# Altium PCB Green.PcbDoc (part 1 of 2)
Units mil, origin at the board's own origin, x right, y up, seen from the top; angles counter-clockwise.
Board outline 6000 x 4000 mil, 4 copper layers (Top Layer, VCC, GND, Bottom Layer); 96 components, 58 nets, 276 pads, 296 vias.
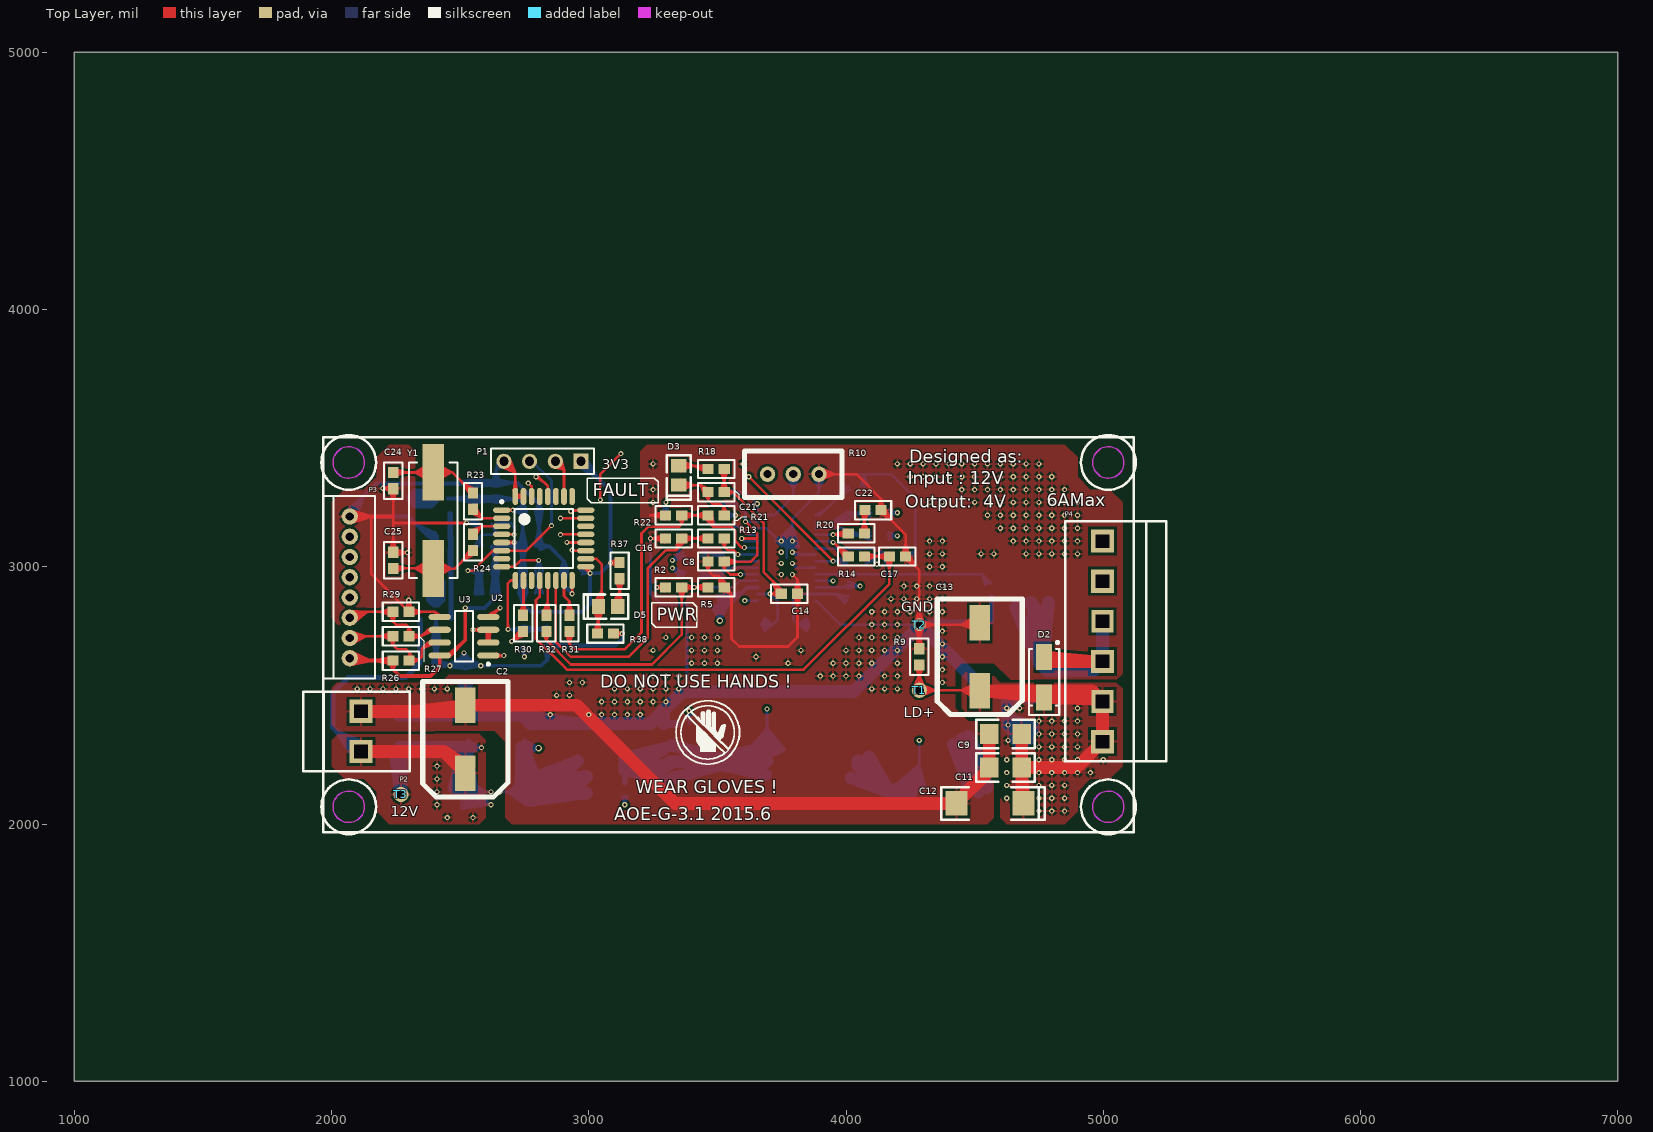
[diagram p0: Top Layer view]
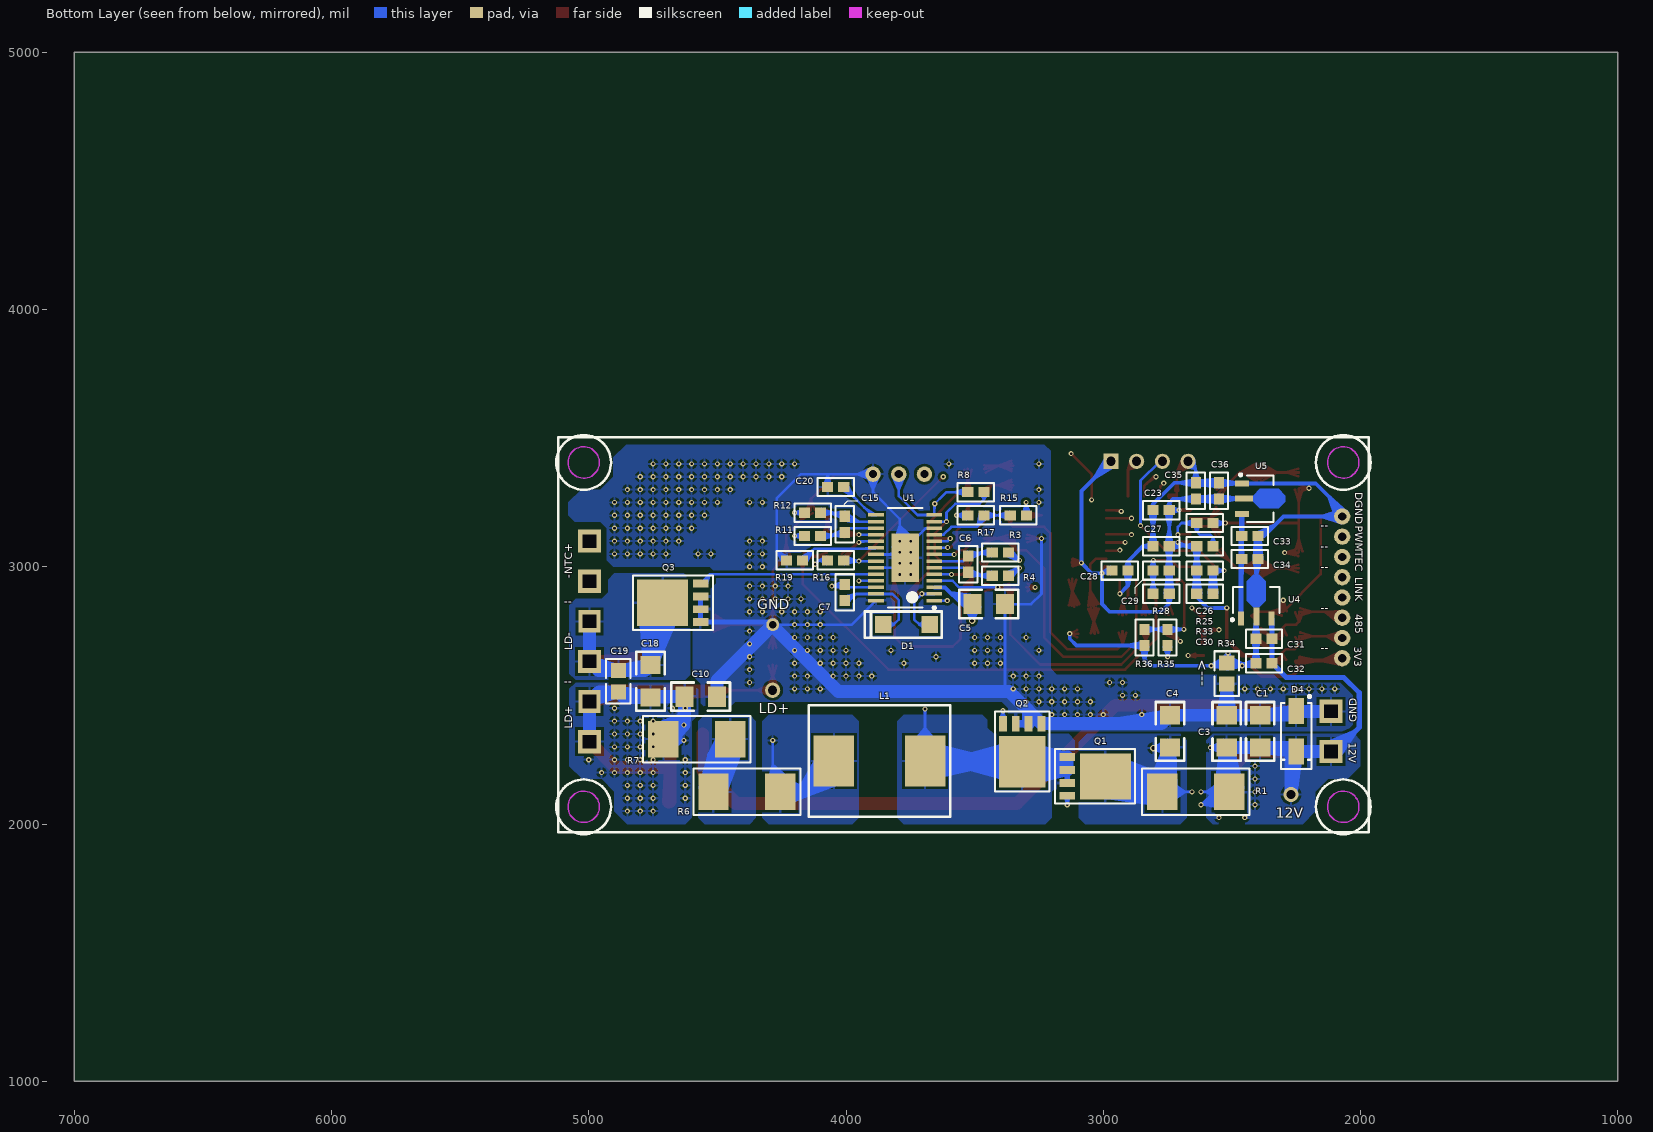
[diagram p1: Bottom Layer view, seen from below]
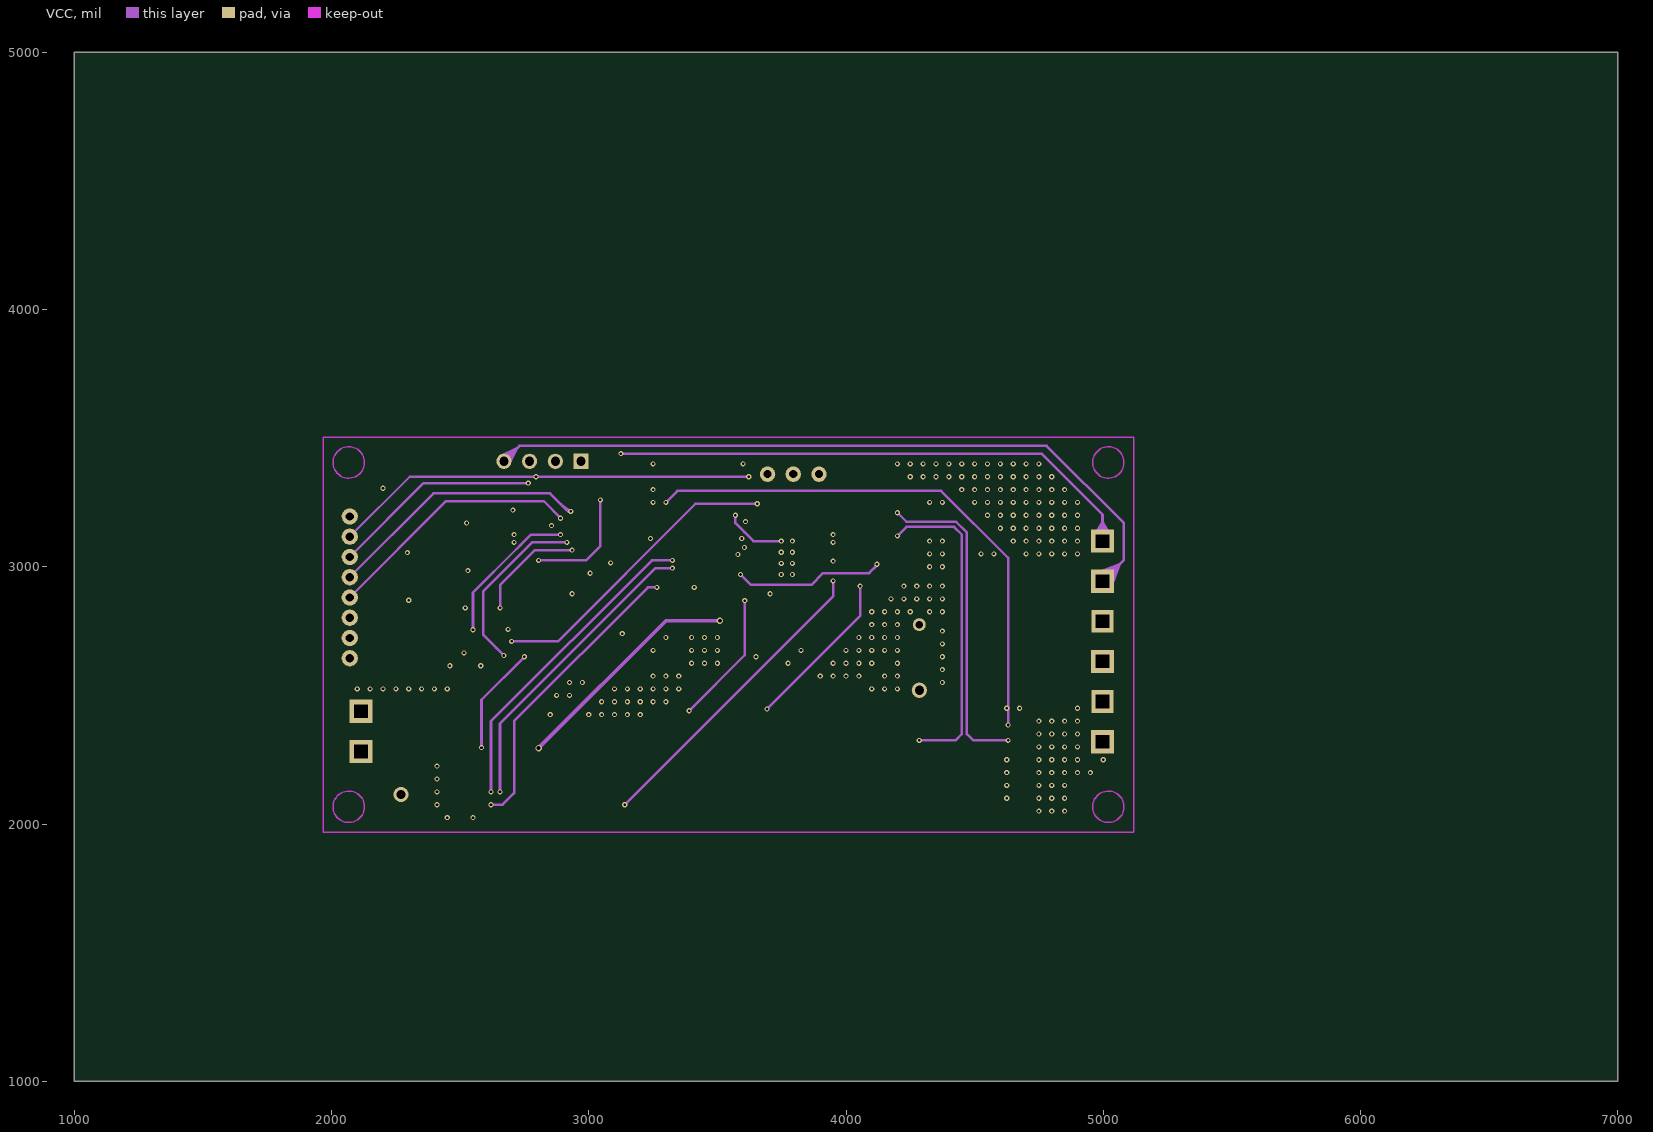
[diagram p2: VCC]
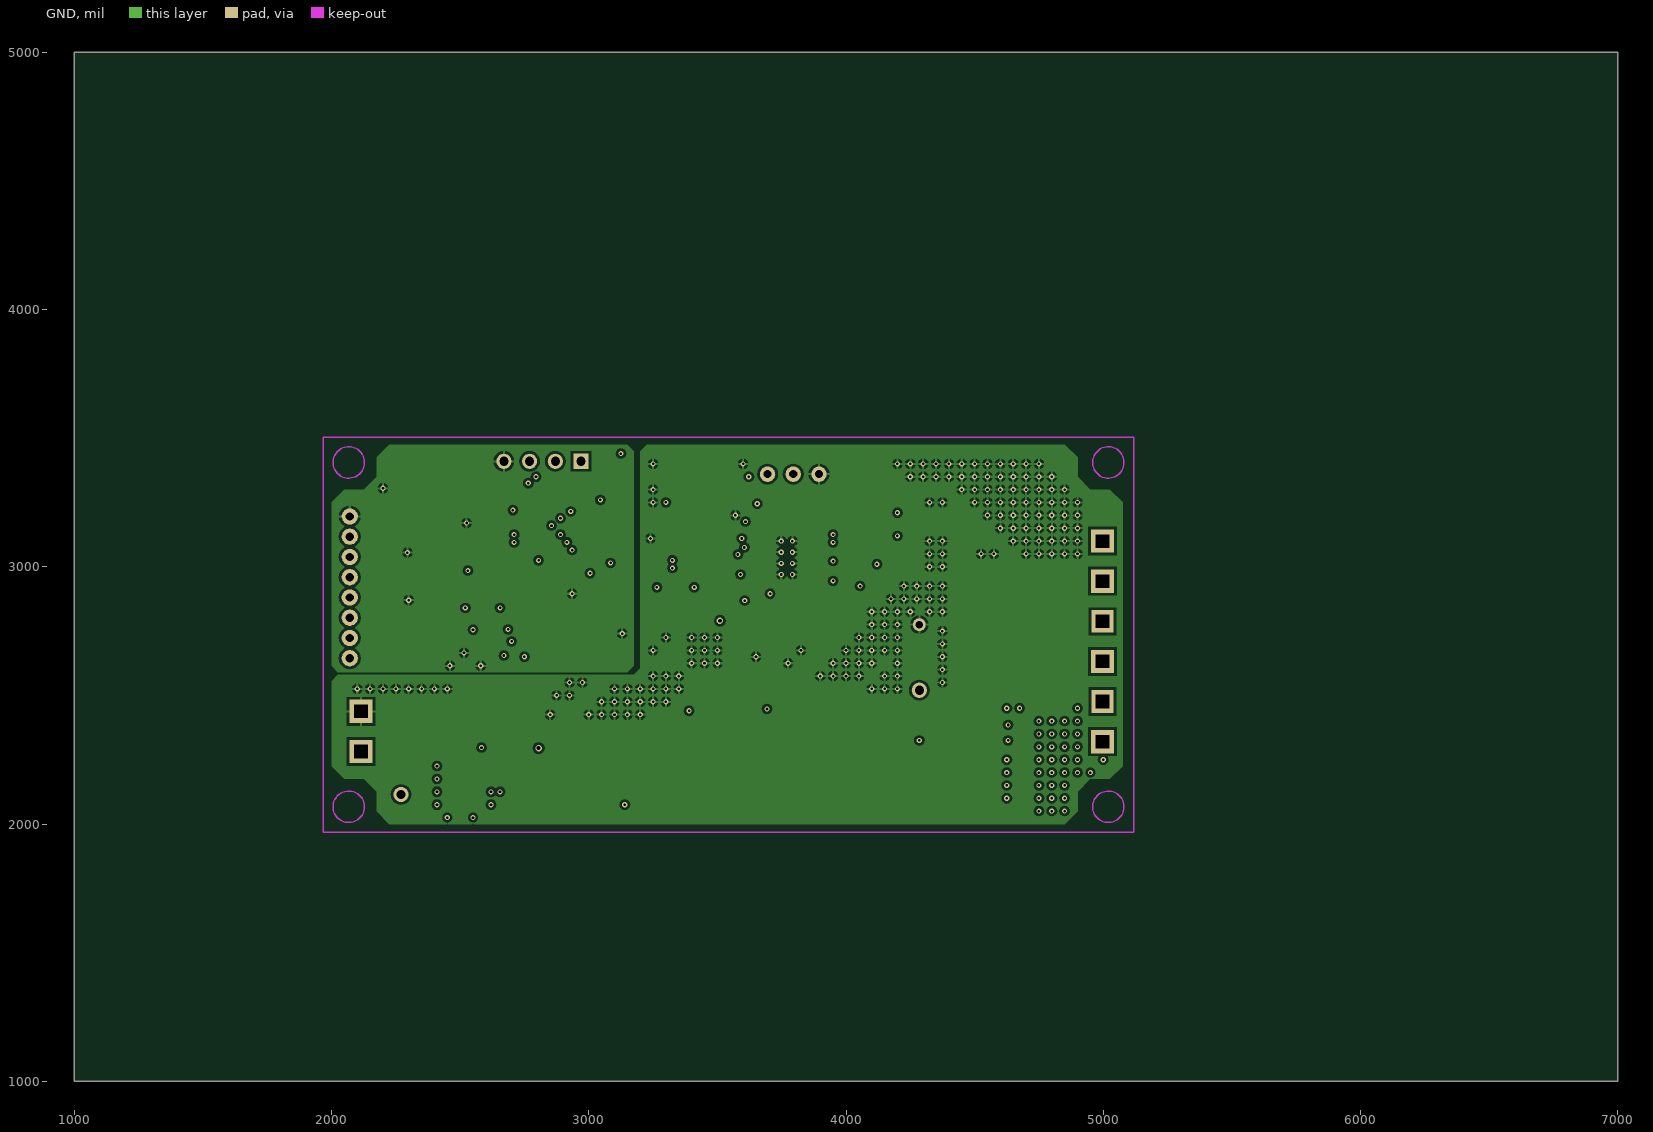
[diagram p3: GND]

## Layer stack, top to bottom
Top Layer: signal copper 1.4
Dielectric: core 12.6, FR-4, Dk 4.8
VCC: signal copper 1.4
Dielectric: prepreg 12.6, FR-4, Dk 4.8
GND: signal copper 1.4
Dielectric: core 12.6, FR-4, Dk 4.8
Bottom Layer: signal copper 1.4

## Board outline
1000,1000 7000,1000 7000,5000 1000,5000

## Design rules (kind name [scope] priority, off if disabled: settings)
Clearance [All] p1: gap=10
DiffPairsRouting [All] p1: maxlimit=10 minlimit=10 mostfreqgap=10 maxuncoupledlength=500
HoleSize [All] p1: absolutevalues=TRUE maxlimit=100 minlimit=8 maxpercent=80.000 minpercent=20.000
PolygonConnect [All] p1: connectstyle=Relief reliefconductorwidth=10 reliefentries=4 polygonreliefangle="90 Angle" airgapwidth=10
RoutingVias [All] p1: holewidth=28 width=50 viastyle="Through Hole" minholewidth=28 minwidth=50 maxholewidth=28 maxwidth=50
SolderMaskExpansion [All] p1: expansion=4
Width [All] p1: maxlimit=50 minlimit=8 preferedwidth=10 midlayer1_minwidth=10 midlayer2_minwidth=10 minimp=50.000000 maximp=50.000000 favimp=50.000000
26 further rules are at their usual default settings.

## Classes and differential pairs
component class 3763: C1 C2 C3 C4 C5 C6 C7 C8 C9 C10 C11 C12 C13 C14 C15 C16 C17 C18 C19 C20 C21 C22 D1 D2 D3 L1 Q1 Q2 Q3 R1 R2 R3 R4 R5 R6 R7 R8 R9 R10 R11 R12 R13 R14 R15 R16 R17 R18 R19 R20 R21 R22 T1 T2 U1
component class MCU: C23 C24 C25 C26 C27 C28 C29 C30 P1 R23 R24 R25 R26 R27 R28 R29 R30 R31 R32 R33 U2 U3 Y1
component class PWR: C31 C32 C33 C34 C35 C36 D4 D5 P2 P3 P4 R34 R35 R36 R37 R38 T3 U4 U5
differential pair SENSE: +SENSE_P -SENSE_N
differential pair IN: +IN_P -IN_N

## Components (designator, comment, footprint, x,y, rotation, side; value= is the part's Value field where it differs from the comment)
C1 "22uF/50V" "1206[3216] - NP" 2390,2360 r270 bottom
C2 "100uF/50V" "SMC_Altium Capacity 8*10" 2520,2330 r180 top
C3 "47uF/50V" "1206[3216] - NP" 2520,2360 r270 bottom
C4 "47uF/50V" "1206[3216] - NP" 2740,2360 r270 bottom
C5 "4.7uF/50V" "1206[3216] - NP" 3445,2855 r180 bottom
C6 "1uF" 1608[0603] 3525,3010 r90 bottom
C7 "220nF" 1608[0603] 4005,2900 r270 bottom
C8 "2.2uF" 1608[0603] 3495,3020 r0 top
C9 "22uF/50V" "1206[3216] - NP" 4620,2350 r0 top
C10 "47uF/50V" "1206[3216] - NP" 4565,2495 r0 bottom
C11 "47uF/50V" "1206[3216] - NP" 4620,2220 r0 top
C12 "100uF/50V" 7343 4690,2080 r180 top
C13 "100uF/50V" "SMC_Altium Capacity 8*10" 4520,2650 r180 top
C14 "4.7uF" 1608[0603] 3780,2895 r180 top
C15 "33nF" 1608[0603] 4005,3165 r90 bottom
C16 "1nF" 1608[0603] 3330,3110 r0 top
C17 "1nF" 1608[0603] 4200,3040 r180 top
C18 "2.2uF/50V" "1206[3216] - NP" 4760,2555 r270 bottom
C19 "100pF/50V" 2012[0805] 4885,2555 r270 bottom
C20 "50nF" 1608[0603] 4040,3310 r180 bottom
C21 "100nF" 1608[0603] 3495,3290 r0 top
C22 "4.7nF" 1608[0603] 4105,3220 r180 top
C23 "100nF" 1608[0603] 2775,3220 r180 bottom
C24 "20pF" 1608[0603] 2240,3335 r270 top
C25 "20pF" 1608[0603] 2240,3025 r90 top
C26 "100nF" 1608[0603] 2605,3170 r0 bottom
C27 "100nF" 1608[0603] 2775,3080 r0 bottom
C28 "100nF" 1608[0603] 2935,2985 r0 bottom
C29 "100nF" 1608[0603] 2775,2985 r0 bottom
C30 "100nF" 1608[0603] 2605,2895 r180 bottom
C31 "22uF" 1608[0603] 2375,2720 r180 bottom
C32 "22uF" 1608[0603] 2375,2625 r180 bottom
C33 "10uF" 1608[0603] 2430,3120 r0 bottom
C34 "100nF" 1608[0603] 2430,3030 r0 bottom
C35 "22uF" 1608[0603] 2640,3295 r270 bottom
C36 "10uF" 1608[0603] 2550,3295 r270 bottom
D1 "Diode 1N5819" SMA 3765,2775 r180 bottom
D2 "SMAJ5CA" SMA_DIOM5226X26N 4770,2570 r270 top
D3 "LED" "2012[0805] - LED" 3350,3355 r270 top
D4 "SMAJ11CA" SMA_DIOM5226X26N 2250,2360 r270 bottom
D5 "LED_RED" "2012[0805] - LED" 3075,2845 r180 top
L1 "Inductor,2.7uH" IHLP4040 3870,2245 r0 bottom
P1 "Header 4" HDR1X4 2970,3410 r180 top
P2 "VH Connector, B2P-VH" 2PIN-B2P_VH 1890,2360 r270 top locked
P3 "HY-8AD" "8P -HY-8AD" 1968.5,2920 r270 top locked
P4 "VH Connector, B6P-VH" 6PIN-B6P_VH 5265,2710 r90 top
Q1 "RJK0305" LFPAK 3140,2260 r270 bottom
Q2 "RJK0301" LFPAK 3240,2390 r0 bottom
Q3 "RJK0305" LFPAK 4565,2785 r90 bottom
R1 "0.002" 2512[6432] 2640,2125 r270 bottom
R2 "NoP_10K" 1608[0603] 3330,2920 r180 top
R3 "1K" 1608[0603] 3400,3055 r180 bottom
R4 "1K" 1608[0603] 3400,2965 r180 bottom
R5 "2K" 1608[0603] 3495,2920 r180 top
R6 "0.008" 2512[6432] 4385,2125 r270 bottom
R7 "0.008" 2512[6432] 4580,2330 r90 bottom
R8 "NoP_6K" 1608[0603] 3495,3290 r0 bottom
R9 "2M" 1608[0603] 4285,2650 r270 top
R10 "20K" RES-adj 3795,3360 r180 top
R11 "10" 1608[0603] 4130,3120 r0 bottom
R12 "10" 1608[0603] 4130,3210 r0 bottom
R13 "50" 1608[0603] 3495,3110 r180 top
R14 "50" 1608[0603] 4040,3040 r0 top
R15 "31.5K" 1608[0603] 3330,3200 r0 bottom
R16 "50" 1608[0603] 4040,3025 r0 bottom
R17 "10K" 1608[0603] 3495,3200 r0 bottom
R18 "10K" 1608[0603] 3495,3380 r180 top
R19 "82.5K" 1608[0603] 4200,3025 r0 bottom
R20 "47.5K" 1608[0603] 4040,3130 r0 top
R21 "500K" 1608[0603] 3495,3200 r180 top
R22 "500K" 1608[0603] 3330,3200 r180 top
R23 "0" 1608[0603] 2550,3255 r270 top
R24 "390" 1608[0603] 2550,3095 r90 top
R25 "10K" 1608[0603] 2605,3080 r0 bottom
R26 "3.3K" 1608[0603] 2270,2635 r180 top
R27 "120" 1608[0603] 2270,2730 r180 top
R28 "3.3K" 1608[0603] 2775,2895 r0 bottom
R29 "3.3K" 1608[0603] 2270,2825 r180 top
R30 "1K" 1608[0603] 2745,2780 r90 top
R31 "1K" 1608[0603] 2925,2780 r90 top
R32 "1K" 1608[0603] 2835,2780 r90 top
R33 "3.3K" 1608[0603] 2605,2985 r180 bottom
R34 "0" 2012[0805] 2520,2585 r270 bottom
R35 "20K" 1608[0603] 2750,2725 r270 bottom
R36 "2K" 1608[0603] 2840,2725 r90 bottom
R37 "10K" 1608[0603] 3120,2985 r90 top
R38 "10K" 1608[0603] 3065,2740 r0 top
T1 "Test Point" TestPoint#1 4285,2520 r0 top
T2 "Test Point" TestPoint#2 4285,2775 r0 top
T3 "Test Point" TestPoint#1 2270,2115 r0 top
U1 "LT3763" TSOP65P640X120_HS-29N 3770,3035 r0 bottom
U2 "STM32F051K8T6" TQFP80P900X900X160-32N 2825,3110 r0 top
U3 "SP3485EN" SOIC127P600-8N 2515,2730 r180 top
U4 "L78L05" SOT89-150P410X160-3N 2405,2870 r90 bottom
U5 "AMS1117-3.3V" SOT89-150P410X160-3N 2390,3265 r180 bottom
Y1 "XTAL" XTAL_SMT 2395,3180 r90 top

## Footprints (in the part's own frame and the unit in brackets; to place one, negate y for a bottom-side part, rotate by r counter-clockwise, add the part's x,y. Pads: shape width x height; smd on the part's side, far side on the other; paste and mask are expansions set on the pad)
2PIN-B2P_VH [mm] "2PIN-B2P_VH"
  rect 2.3x2.3 hole 1.3 square: 1(-1.98,5.7) 2(1.98,5.7)
  silkscreen extent -3.93,0 3.93,10.5
6PIN-B6P_VH [mm] "2PIN-B6P_VH"
  rect 2.3x2.3 hole 1.3 square: 1(-9.9,6.8) 3(-1.98,6.8) 5(5.94,6.8) 6(9.9,6.8)
  rect 2.3x2.2 hole 1.3 square: 2(-5.94,6.8)
  rect 2.2x2.2 hole 1.3 square: 4(1.98,6.8)
  silkscreen extent -11.85,0.5 11.85,10.5
"8P -HY-8AD" [mm] "8Pin, HY-8AD"
  round 1.6 hole 0.8: 1(-7,2.6) 2(-5,2.6) 3(-3,2.6) 4(-1,2.6) 5(1,2.6) 6(3,2.6) 7(5,2.6) 8(7,2.6)
  silkscreen extent -9,0 9,5.1
"1206[3216] - NP" [mm] "Chip Resistor; Body 3.2 x 1.6 mm (LxW typ)"
  rect 1.8x2 smd: 1(-1.6,0) 2(1.6,0)
  silkscreen extent -2.9,-1.4 2.9,1.4, body extent -2.2,-0.8 2.2,0.8, height 3
1608[0603] [mm]
  rect 1.1x1 smd: 1(-0.8,0) 2(0.8,0)
  silkscreen extent -1.8,-0.9 1.8,0.9
2012[0805] [mm] "Chip Resistor; Body 2.0 x 1.3 mm (LxW typ)"
  rect 1.5x1.5 smd: 1(-1.05,0) 2(1.05,0)
  silkscreen extent -2.2,-1.2 2.2,1.2, body extent -1.8,-0.7 1.8,0.7, height 3
"2012[0805] - LED" [mm] "Chip Resistor; Body 2.0 x 1.3 mm (LxW typ)"
  rect 1.3x1.5 smd: 1(-0.95,0) 2(0.95,0)
  silkscreen extent -2,-1.2 2.4,1.2
2512[6432] [mm] "6.4*3.2"
  rect 3.6x3 smd: 1(0,3.3) 2(0,-3.3)
  silkscreen extent -2.3,-5.3 2.3,5.3
7343 [mm] "D型钽电容，极性"
  rect 2.16x2.41 smd: 1(0,0) 2(6.61,0)
  silkscreen extent -2.1,-1.6 8.1,1.6
HDR1X4 [mm] "Connector; Header; 4 Position"
  rect 1.5x1.5 hole 0.9: 1(0,0)
  round 1.5 hole 0.9: 2(2.54,0) 3(5.08,0) 4(7.62,0)
  silkscreen extent -1.27,-1.27 8.89,1.27
IHLP4040 [mm] "Inductor, IHLP5050CEER1R0M01"
  rect 4x5 smd: 1(-4.5,0) 2(4.5,0)
  silkscreen extent -7,-5.5 7,5.5
LFPAK [mm] "Renesas MOSFET"
  rect 0.78x1.52 smd: 1(0,0) 2(1.27,0) 3(2.54,0) 4(3.81,0)
  rect 4.57x5.04 smd: 5(1.905,3.76)
  silkscreen extent -0.8,-1.2 4.6,6.7
RES-adj [mil]
  round 60 hole 31.5: 1(-100,0) 2(0,0) 3(100,0)
  silkscreen extent -189,-91 189,91
SMA [mm]
  rect 1.6x1.67 smd: 1(2.3,0) 2(-2.3,0)
  silkscreen extent -4.1,-1.3 3.5,1.3
SMA_DIOM5226X26N [mm] "Molded Diode, 2-Leads, Body 5.20x2.61mm, IPC Medium Density"
  rect 2.55x1.55 smd: 1(-2,0) 2(2,0)
  silkscreen extent -3.57,-1.5 3.7,1.5, body extent -2.8,-1.46 2.79,1.46, height 2.62
"SMC_Altium Capacity 8*10" [mm] "SMC_Altium Capcitor, 8*10"
  rect 2x3.5 smd: 1(0,3.35) 2(0,-3.35)
  silkscreen extent -4.2,-5.7 4.2,5.7
SOIC127P600-8N [mm]
  oval 2.2x0.6 smd: 1(-2.4,1.905) 2(-2.4,0.635) 3(-2.4,-0.635) 4(-2.4,-1.905) 5(2.4,-1.905) 6(2.4,-0.635) 7(2.4,0.635) 8(2.4,1.905)
  silkscreen extent -2.53,-2.5 0.9,2.88, body extent -2,-2.5 2,2.5, height 1.75
SOT89-150P410X160-3N [mm] "SOT89, 3-Leads, Body 4.50x2.45mm, Pitch 1.50mm, Lead Span 4.1mm, IPC Medium Density"
  rect 1.4x0.6 smd: 1(-1.8,1.5) 3(-1.8,-1.5)
  rect 1.8x0.6 smd: 2(-1.6,0)
  Top Layer region: -0.7,0.3 -0.05,0.95 1.85,0.95 2.5,0.3 2.5,-0.3 1.85,-0.95 -0.05,-0.95 -0.7,-0.3
  silkscreen extent -2.05,-2.3 1.32,2.48, body extent -1.28,-2.3 1.32,2.3, height 1.6
TestPoint#1 [mm] "TestPoint"
  round 1.5 hole 0.9: 1(0,0)
TestPoint#2 [mm] "TestPoint"
  round 1.27 hole 0.762: 1(0,0)
TQFP80P900X900X160-32N [mm] "TQFP, 32-Leads, Body 7.00x7.00mm, Pitch 0.80mm, IPC Medium Density"
  oval 1.7x0.55 smd: 1(-4.15,2.8) 2(-4.15,2) 3(-4.15,1.2) 4(-4.15,0.4) 5(-4.15,-0.4) 6(-4.15,-1.2) 7(-4.15,-2) 8(-4.15,-2.8) 17(4.15,-2.8) 18(4.15,-2) 19(4.15,-1.2) 20(4.15,-0.4) 21(4.15,0.4) 22(4.15,1.2) 23(4.15,2) 24(4.15,2.8)
  oval 0.55x1.7 smd: 9(-2.8,-4.15) 10(-2,-4.15) 11(-1.2,-4.15) 12(-0.4,-4.15) 13(0.4,-4.15) 14(1.2,-4.15) 15(2,-4.15) 16(2.8,-4.15) 25(2.8,4.15) 26(2,4.15) 27(1.2,4.15) 28(0.4,4.15) 29(-0.4,4.15) 30(-1.2,4.15) 31(-2,4.15) 32(-2.8,4.15)
  silkscreen extent -4.27,-2.9 2.9,3.75, body extent -3.5,-3.5 3.5,3.5, height 1.6
TSOP65P640X120_HS-29N [mm] "TSOP, 28-Leads, Body 9.70x4.40mm, Pitch 0.65mm, Thermal Pad 4.75.2x2.74.2mm, IPC Medium Density"
  rect 1.55x0.35 smd: 1(-2.875,4.225) 2(-2.875,3.575) 3(-2.875,2.925) 4(-2.875,2.275) 5(-2.875,1.625) 6(-2.875,0.975) 7(-2.875,0.325) 8(-2.875,-0.325) 9(-2.875,-0.975) 10(-2.875,-1.625) 11(-2.875,-2.275) 12(-2.875,-2.925) 13(-2.875,-3.575) 14(-2.875,-4.225) 15(2.875,-4.225) 16(2.875,-3.575) 17(2.875,-2.925) 18(2.875,-2.275) 19(2.875,-1.625) 20(2.875,-0.975) 21(2.875,-0.325) 22(2.875,0.325) 23(2.875,0.975) 24(2.875,1.625) 25(2.875,2.275) 26(2.875,2.925) 27(2.875,3.575) 28(2.875,4.225)
  rect 2.74x4.75 smd: 29(0,0)
  silkscreen extent -3,-4.9 1.7,5.07, body extent -2.25,-4.9 2.25,4.9, height 1.2
XTAL_SMT [mm]
  rect 5.6x2.1 smd: 1(-4.75,0) 2(4.75,0)
  silkscreen extent -5.7,-2.4 5.7,2.4

## Part data
C1 C3 C4 C5 C6 C7 C8 C9 C10 C11 C14 C15 C16 C17 C18 C19 C20 C21 C22 C23 C24 C25 C26 C27 C28 C29 C30 C31 C32 C33 C34 C35 C36: library part Cap, "Capacitor"
C2 C13: library part "Cap Pol1", "Altium Electrolytic Cap"
C12: library part "Cap Pol1", "Tantum Cap"
D1 D2 D4: library part "D Schottky", "Schottky Diode"
D3 D5: library part LED0, "Typical INFRARED GaAs LED"
L1: library part Inductor, "Inductor"
P1: "Header, 4-Pin"
P2: library part "Header 2", "Header, 2-Pin"
P3: library part "Header 8", "Header, 8-Pin"
P4: library part "Header 6", "Header, 6-Pin"
Q1 Q2 Q3: library part PWR_RJK030, "N_MOSFET"
R1 R2 R3 R4 R5 R6 R7 R8 R9 R11 R12 R13 R14 R15 R16 R17 R18 R19 R20 R21 R22 R23 R24 R25 R26 R27 R28 R29 R30 R31 R32 R33 R34 R35 R36 R37 R38: library part Res1, "Resistor"
R10: library part "Res Adj1", "Variable Resistor"
T1 T2 T3: library part TP
U1: library part PWR_LT3763, "60V High Current   Step-Down LED Driver Controller"
U2: library part MCU_STM32F051K8T6, "Low- and medium-density advanced ARM?-based 32-bit MCU with  16 to 64 Kbytes Flash, timers, ADC, DAC and comm. interfaces"
U3: library part LGC_RS485, "Low-Power, Slew-Rate-Limited  RS-485/RS-422 Transceivers"
U4: library part PWR_L78L05, "POSITIVE VOLTAGE REGULATORS"
U5: library part PWR_LM1XXX, "5Vת3V3 10mA  DC/DC"
Y1: "Crystal Oscillator"

## Via types
v1: diameter 20, hole 10, Top Layer to Bottom Layer, tented both sides, 286 vias
v2: diameter 20, hole 10, Top Layer to Bottom Layer, 8 vias
v3: diameter 25, hole 15, Top Layer to Bottom Layer, tented both sides, 2 vias

## Nets (pads, with @x,y where several pads share a name; then routed paths per layer and width w, separated by ;. In a path a pad name is that pad's centre, name@x,y a point inside that pad or via, vN(x,y) a via of type N, cw(c..) or ccw(c..) an arc to the next point about the centre after c; other vN are vias at no path point)
3V3: C23.2 C27.1 C28.2 C29.1 C30.1 C35.2 C36.2 P1.1 P3.8 R25.2 R26.2 R28.1 R33.1 R37.2 U2.1 U2.5 U2.17 U3.8 U5.2 | length 9764.4
  Top Layer w10: U2.17@2983.89,2996.06 v1(3005,2975) ; v1(3005,2975) 2988.39,2991.61 U2.17@2988.39,2999.76 v1(3005,2975) ; v1(3005,2975) 2993.52,3002.52 v1(3005,2975)
  Top Layer w15: P3.8@2070.3,2635.43 2148.65,2635 ; P3.8@2071.67,2620.43 2148.65,2635 ; P3.8@2072.46,2653.26 2148.65,2635 ; P3.8@2077.36,2667.51 2148.65,2635 ; R26.2@2226.52,2632.78 2238.5,2601.5 ; R26.2@2235.39,2622.87 2171.85,2635 ; R26.2@2235.39,2647.13 2171.85,2635 ; R26.2@2236.54,2635 2171.85,2635 ; R26.2@2250.49,2632.78 2238.5,2601.5 ; U3.8@2452.01,2655 2508.19,2703.19 ; v1(2520,2840) 2520,2715 2460,2655 U3.8@2420.51,2655 2420.51,2610.51 2385,2575 2265,2575 2238.5,2601.5 ; U2.1@2660,3221.85 U2.1@2661.61,3220.24 U2.1@2661.85,3220 ; 2148.65,2635 P3.8@2070.87,2644.41 2080.28,2635 R26.2@2238.5,2635 2238.5,2601.5 ; U2.1@2661.85,3220 v1(2705,3220) ; U2.1@2661.85,3220 v1(2705,3220) ; v1(2705,3220) 2684.25,3220.24 v1(2705,3220) ; v1@2709.25,3094.25 v1(2710,3095) ; v1@2709.25,3094.25 U2.5@2661.61,3094.25 v1(2710,3095) ; v1@2709.25,3094.25 2684.25,3094.25 v1(2710,3095) ; v1(3085,3015) v1@3086.5,3016.5 ; v1(3085,3015) R37.2@3120,3016.5 v1@3086.5,3016.5 ; v1(3085,3015) 3117.78,3004.51 v1@3086.5,3016.5 ; v1(3085,3015) 3117.78,3028.48 v1@3086.5,3016.5
  Bottom Layer w10: R25.2@2636.5,3080 C27.1@2725,3080 ; R25.2@2638.46,3080 2688.15,3080 ; R25.2@2640.63,3065.48 2688.15,3080 ; R25.2@2640.63,3094.52 2688.15,3080 ; 2663.63,3080 v1(2710,3095) ; C27.1@2739.37,3065.48 2691.85,3080 ; C27.1@2743.5,3080 C27.1@2725,3080 ; 2691.85,3080 2739.37,3094.52 v1(2710,3095) ; 2691.85,3080 2741.54,3080 v1(2710,3095) ; 2691.85,3080 v1(2710,3095) ; 2691.85,3080 v1(2710,3095) ; v1(2710,3095) C27.1@2725,3080 ; 2995,2985 v1(3005,2975) ; 2995,2985 C28.2@2966.5,2985 v1(3005,2975) ; 2995,2985 2972.53,2999.11 v1(3005,2975) ; 2995,2985 2972.53,2970.89 v1(3005,2975) ; 2995,2985 2968.46,2985 v1(3005,2975)
  Bottom Layer w15: U5.2@2452.99,3265 C35.2@2638.5,3265 ; v1(2520,2840) 2595,2840 2636.5,2881.5 C30.1@2636.5,2895 ; C36.2@2533.46,3263.89 U5.2@2476.61,3265 ; C36.2@2533.43,3265 U5.2@2476.61,3265 ; C36.2@2534.63,3273.24 U5.2@2476.61,3265 ; C36.2@2535.08,3254.3 U5.2@2476.61,3265 ; C36.2@2548.57,3251.4 U5.2@2485.28,3265 ; C36.2@2549.13,3275.66 U5.2@2485.28,3265 ; C36.2@2550,3261.54 2617.07,3256.02 ; C36.2@2550,3277.66 2614.59,3271.56 ; C36.2@2550.11,3249.35 2617.07,3256.02 ; C36.2@2550.82,3251.35 C35.2@2640,3263.5 ; C36.2@2550.82,3275.66 C35.2@2640,3263.5 ; C36.2@2550.87,3275.66 2614.72,3265 ; C36.2@2551.43,3251.4 2614.72,3265 ; C36.2@2552.09,3273.54 2617.07,3256.02 ; C36.2@2552.28,3253.5 2614.59,3271.56 ; C30.1@2622.34,2895.08 2628.84,2960.39 ; C30.1@2624.37,2896.15 2636.5,2959.68 C30.1@2648.63,2896.15 ; R33.1@2624.37,2983.85 2636.5,2920.32 ; R33.1@2624.37,2986.15 2636.5,3049.68 R33.1@2648.63,2986.15 ; R25.2@2624.37,3078.85 2636.5,3015.32 R25.2@2648.63,3078.85 ; C30.1@2626.48,2897.18 2644.15,2960.39 ; C30.1@2634.53,2895 2628.84,2960.39 ; R25.2@2636.5,3080 R33.1@2636.5,2985 C30.1@2636.5,2895 ; C30.1@2638.46,2895 2644.15,2960.39 ; C35.2@2638.57,3251.4 2575.27,3265 ; C35.2@2639.13,3275.66 2575.27,3265 ; C35.2@2641.15,3251.37 2704.69,3263.5 C35.2@2641.15,3275.63 ; C30.1@2646.52,2897.18 2628.84,2960.39 ; R33.1@2648.63,2983.85 2636.5,2920.32 ; C30.1@2650.65,2895.08 2644.15,2960.39 ; C27.1@2725,3080 v1(2710,3095) ; R28.1@2729.35,2895.08 2735.85,2960.39 ; R28.1@2731.37,2896.15 2743.5,2959.68 R28.1@2755.63,2896.15 ; C29.1@2731.37,2983.85 2743.5,2920.32 ; C29.1@2731.37,2986.15 2743.5,3049.68 C29.1@2755.63,2986.15 ; C27.1@2731.37,3078.85 2743.5,3015.32 C27.1@2755.63,3078.85 ; C27.1@2731.37,3081.15 2743.5,3144.68 C27.1@2755.63,3081.15 ; C23.2@2731.37,3218.85 2743.5,3155.32 ; R28.1@2731.47,2893.07 2743.5,2856.5 ; C23.2@2731.6,3222.6 2743.5,3248.5 ; R28.1@2733.48,2897.18 2751.16,2960.39 ; C27.1@2734.46,3070.08 v1(2710,3095) ; C23.2@2739.5,3207.99 v1(2705,3220) ; C23.2@2739.5,3232.01 v1(2705,3220) ; R28.1@2741.54,2895 2735.85,2960.39 ; C27.1@2741.54,3080 v1(2710,3095) ; C23.2@2741.54,3220 v1(2705,3220) ; C27.1@2744.77,3091.75 v1(2710,3095) ; R28.1@2745.47,2895 2751.16,2960.39 ; R28.1@2753.52,2897.18 2735.85,2960.39 ; C23.2@2755.41,3222.6 2743.5,3248.5 ; R28.1@2755.54,2893.07 2743.5,2856.5 ; C29.1@2755.63,2983.85 2743.5,2920.32 ; C23.2@2755.63,3218.85 2743.5,3155.32 ; R28.1@2757.66,2895.08 2751.16,2960.39 ; P1.1@2956.53,3392.57 3031.35,3348.65 P1.1@2987.43,3423.47 ; P1.1@2970,3410 3085,3295 v1(3085,3015) 3045,2975 v1(3005,2975) 3005,2855 2975,2825 2775,2825 2743.5,2856.5 ; U5.2@2485.28,3265 C36.2@2550,3263.5 ; C36.2@2550,3263.5 2614.72,3265 ; C36.2@2550,3263.5 C35.2@2640,3263.5 ; C36.2@2550,3265.47 2575.27,3265 ; C36.2@2550,3265.47 2575.27,3265 ; C36.2@2550,3265.47 2614.59,3271.56 ; C36.2@2550,3265.47 2575.27,3265 ; C36.2@2552.72,3253.59 2575.27,3265 ; C36.2@2552.72,3253.59 2575.27,3265 ; C36.2@2552.72,3253.59 2575.27,3265 ; C36.2@2553.16,3277.24 2575.27,3265 ; C36.2@2553.16,3277.24 2575.27,3265 ; C36.2@2553.16,3277.24 2575.27,3265 ; 2575.27,3265 C35.2@2640,3263.5 ; C30.1@2636.5,2895 2636.5,2920.32 ; C30.1@2636.5,2895 2636.5,2920.32 ; 2636.5,2920.32 2624.67,2897.93 2636.5,2920.32 ; 2636.5,2920.32 2648.32,2897.93 2636.5,2920.32 ; C35.2@2640,3263.5 2728.5,3263.5 2743.5,3248.5 ; v1(2705,3220) C23.2@2743.5,3220 ; 2743.5,2856.5 R28.1@2743.5,2895 ; R28.1@2743.5,2895 C29.1@2743.5,2985 C27.1@2743.5,3080 C23.2@2743.5,3220 ; R28.1@2743.5,2895 2743.5,2920.32 ; R28.1@2743.5,2895 2743.5,2920.32 ; 2743.5,2920.32 2731.68,2897.93 2743.5,2920.32 ; 2743.5,2920.32 2755.33,2897.93 2743.5,2920.32 ; 2743.5,3155.32 C23.2@2743.5,3220 ; C23.2@2743.5,3220 2743.5,3248.5
5V: C33.2 C34.2 U4.1 U5.3 | length 951
  Bottom Layer w20: U5.3@2460.92,3199.68 C33.2@2461.5,3120 ; C33.2@2461.5,3134.12 U5.3@2460.87,3205.94 2461.5,3205.31 C33.2@2461.5,3120 ; C33.2@2461.82,3109.99 C34.2@2461.5,3030 ; U4.1@2464.06,2799.13 2464.06,3117.44 C33.2@2461.5,3120 ; U4.1@2464.06,2814.88 2464.06,2886.69 ; 2464.06,2950.18 C34.2@2461.5,3030 ; C34.2@2464.06,3040.15 C33.2@2461.5,3120 ; C33.2@2464.06,3109.78 C34.2@2461.5,3030
485A: P3.6 R27.1 R29.2 U3.6 | length 1635.2
  Top Layer w10: P3.6@2067.04,2828.11 2137.53,2825 ; P3.6@2067.32,2818 2137.53,2825 ; P3.6@2069.02,2808.12 2137.53,2825 ; P3.6@2073.27,2795.86 2137.53,2825 ; P3.6@2078.05,2787.04 2137.53,2825 ; P3.6@2084.09,2778.93 2137.53,2825 ; R29.2@2224.09,2822.2 2238.5,2786.5 ; R29.2@2234.37,2810.48 2186.85,2825 ; R29.2@2234.37,2839.52 2186.85,2825 ; R29.2@2236.54,2825 2186.85,2825 ; R29.2@2252.92,2822.2 2238.5,2786.5 ; R27.1@2287.17,2733.22 2301.5,2763.5 ; R27.1@2303.46,2730 2350,2730 ; R27.1@2305.78,2715.5 2350,2730 ; R27.1@2305.78,2744.5 2350,2730 ; R27.1@2315.82,2733.22 2301.5,2763.5 ; U3.6@2384.95,2760.47 2350.99,2730.99 ; U3.6@2392.21,2748.98 2350.99,2730.99 ; U3.6@2420.51,2755 2375,2755 ; 2137.53,2825 P3.6@2070.87,2801.89 2093.98,2825 R29.2@2238.5,2825 ; 2238.5,2786.5 2250,2775 2290,2775 2301.5,2763.5 ; 2238.5,2786.5 R29.2@2238.5,2825 ; 2238.5,2786.5 R29.2@2238.5,2825 ; 2301.5,2763.5 R27.1@2301.5,2730 2350,2730 ; 2350,2730 2375,2755 ; 2350.99,2730.99 U3.6@2389.02,2755 ; 2375,2755 2387.36,2748.39 2375,2755 ; 2375,2755 2387.36,2761.61 2375,2755 ; 2375,2755 U3.6@2389.02,2755 ; 2375,2755 U3.6@2389.02,2755
485B: P3.7 R26.1 R27.2 U3.7 | length 1451.4
  Top Layer w10: P3.7@2070.49,2729.63 2132.98,2730 ; P3.7@2071.24,2739.64 2132.98,2730 ; P3.7@2071.91,2716.74 2132.98,2730 ; P3.7@2073.61,2749.5 2132.98,2730 ; P3.7@2074.82,2707.14 2132.98,2730 ; P3.7@2079.29,2698.03 2132.98,2730 ; R27.2@2224.18,2726.78 2238.5,2696.5 ; R27.2@2234.37,2715.48 2186.85,2730 ; R27.2@2234.37,2744.52 2186.85,2730 ; R27.2@2236.54,2730 2186.85,2730 ; R27.2@2252.83,2726.78 2238.5,2696.5 ; R26.1@2289.43,2639.31 2305,2665 ; R26.1@2305.08,2649.6 2338.5,2638.5 ; R26.1@2307.94,2621.01 2338.5,2638.5 ; R26.1@2317.87,2637.86 2305,2665 ; U3.7@2384.95,2710.47 2350.99,2680.99 ; U3.7@2387.36,2698.39 2375,2705 ; U3.7@2387.36,2711.61 2375,2705 ; U3.7@2392.21,2698.98 2350.99,2680.99 ; 2132.98,2730 P3.7@2070.87,2723.15 2077.72,2730 R27.2@2238.5,2730 2238.5,2696.5 ; 2238.5,2696.5 2255,2680 2290,2680 2305,2665 ; 2305,2665 2305,2638.5 2338.5,2638.5 ; 2305,2665 2303.46,2635 2338.5,2638.5 ; 2338.5,2638.5 2350,2650 2350,2680 2375,2705 ; 2350.99,2680.99 2389.02,2705 2375,2705
485DIR: U2.21 U3.2 U3.3 | length 1369.9
  Top Layer w10: U3.3@2577.16,2748.24 v1(2550,2755) ; U3.3@2577.16,2761.76 v1(2550,2755) ; U3.3@2577.99,2755 v1(2550,2755) ; U3.2@2602.7,2705.55 2609.49,2746.81 U3.2@2616.28,2705.55 ; U3.3@2602.7,2754.45 2609.49,2713.19 U3.3@2616.28,2754.45 ; U3.3@2602.69,2755.34 U3.2@2603.97,2713.29 ; U3.3@2602.83,2753.56 U3.2@2615,2713.29 ; U3.2@2609.49,2705 U3.3@2609.49,2755 ; U3.3@2616.15,2753.56 U3.2@2603.97,2713.29 ; U3.3@2616.29,2755.34 U3.2@2615,2713.29 ; v1(2890,3125) 2930.02,3125.75 ; v1@2890,3125.75 U2.21@2988.39,3125.75 ; v1(2550,2755) U3.3@2609.49,2755 ; U3.2@2603.97,2713.29 U3.3@2609.49,2755 ; U3.3@2609.49,2755 U3.2@2615,2713.29
  VCC w10: v1(2550,2755) 2550,2900 2720,3070 2720.36,3070 2735,3084.64 2735,3085 2775,3125 v1(2890,3125) 2850,3125
CTRL1: R8.2 R10.2 R30.1 U1.14 | length 2544.2
  Top Layer w10: 2725.26,2744.09 v1(2700,2710) ; R30.1@2733.24,2737.1 v1(2700,2710) ; R30.1@2734.36,2756.66 v1@2702.16,2712.16 ; R30.1@2737.22,2727.32 v1(2700,2710) ; R30.1@2745,2746.54 v1@2702.16,2712.16 ; R30.1@2745,2748.5 2738.5,2748.5 v1(2700,2710) ; R30.1@2752.58,2733.96 v1@2702.16,2712.16
  VCC w10: v1(2700,2710) 2880,2710 3415,3245 v1(3655,3245)
  Bottom Layer w10: R8.2@3526.5,3290 3610,3290 v1(3655,3245) ; R8.2@3528.46,3290 3578.15,3290 ; R8.2@3530.63,3275.48 3578.15,3290 ; R8.2@3530.63,3304.52 3578.15,3290 ; 3623.79,3276.21 v1(3655,3245) ; U1.14@3656.81,3204.88 v1(3655,3245) ; U1.14@3680.43,3201.34 3717.32,3201.34 ; R10.2@3770.55,3354.79 3795,3300 ; R10.2@3780.12,3358.12 3795,3300 ; R10.2@3809.88,3358.12 3795,3300 ; R10.2@3819.45,3354.79 3795,3300 ; v1(3655,3245) 3656.81,3243.19 U1.14@3656.81,3201.34 3721.34,3201.34 3795,3275 R10.2@3795,3360 3795,3300
EN/UVLO: R2.1 R5.2 R32.1 U1.4 | length 1830.9
  Top Layer w10: R32.1@2820.72,2743.12 2835,2715 ; R32.1@2835,2746.54 2835,2715 ; R32.1@2835,2748.5 2835,2715 ; R32.1@2849.28,2743.12 2835,2715 ; R2.1@3346.97,2917.83 3361.5,2870.32 R2.1@3376.02,2917.83 ; R2.1@3363.46,2920 v1(3410,2920) ; R2.1@3365.78,2905.5 v1(3410,2920) ; R2.1@3365.78,2934.5 v1(3410,2920) ; R5.2@3448.83,2908.7 v1(3410,2920) ; R5.2@3448.83,2931.3 v1(3410,2920) ; R5.2@3450,2920 v1(3410,2920) ; R5.2@3459.37,2905.48 v1@3411.85,2920 ; R5.2@3459.37,2934.52 v1@3411.85,2920 ; R5.2@3461.54,2920 v1@3411.85,2920 ; R5.2@3463.5,2920 v1(3410,2920) ; 2835,2715 2930,2620 3245,2620 3361.5,2736.5 R2.1@3361.5,2920 v1(3410,2920)
  Bottom Layer w10: v1(3410,2920) 3560,2920 3585,2945 3656.38,2945 U1.4@3656.81,2945.43 ; 3596.3,2945 U1.4@3633.19,2945.43
F\A\U\L\T\: R21.2 R22.1 R31.1 U1.9 | length 2224.1
  Top Layer w10: R31.1@2910.5,2744.22 2925,2700 ; R31.1@2925,2746.54 2925,2700 ; R31.1@2925,2748.5 2925,2700 ; R31.1@2939.5,2744.22 2925,2700 ; R22.1@3347.17,3196.78 3361.5,3166.5 ; R22.1@3363.46,3200 3413.15,3200 ; R22.1@3365.63,3185.48 3413.15,3200 ; R22.1@3365.63,3214.52 3413.15,3200 ; R22.1@3375.82,3196.78 3361.5,3166.5 ; R21.2@3453.03,3192.2 3485,3155 ; R21.2@3459.37,3185.48 3411.85,3200 ; R21.2@3459.37,3214.52 3411.85,3200 ; R21.2@3461.54,3200 3411.85,3200 ; R21.2@3465.47,3200 3485,3155 ; R21.2@3479.67,3203.76 3485,3155 ; 2925,2700 2945,2680 3140,2680 3205,2745 3205,3130 3230,3155 3350,3155 3361.5,3166.5 ; 3361.5,3166.5 R22.1@3361.5,3200 R21.2@3463.5,3200 ; 3463.5,3176.5 R21.2@3463.5,3200 ; 3463.5,3176.5 3485,3155 ; 3463.5,3176.5 3477.45,3195.41 3463.5,3176.5 ; 3463.5,3176.5 3449.55,3195.41 3463.5,3176.5 ; 3463.5,3176.5 R21.2@3463.5,3200 ; 3485,3155 3555,3155 3570,3140 3570,3099.64 3594.64,3075 ; 3594.64,3075 v1(3605,3075) ; 3594.64,3075 v1(3605,3075) ; 3594.64,3075 v1(3605,3075)
  Bottom Layer w10: U1.9@3645.1,3073.39 v1(3605,3075) ; U1.9@3656.81,3073.39 v1@3606.61,3073.39 ; v1(3605,3075) v1@3606.61,3073.39 ; v1(3605,3075) 3633.19,3073.39 v1@3606.61,3073.39
GND: C1.1 C2.2 C3.1 C4.1 C5.2 C8.1 C9.1 C10.1 C11.1 C12.2 C13.2 C14.1 C16.1 C17.1 C20.1 C22.1 D4.1 P2.1 Q2.1 Q2.2 Q2.3 Q3.1 Q3.2 Q3.3 R5.1 R9.1 R10.1 R17.2 R19.2 R22.2 R34.2 T2.1 U1.12 U1.21 U1.23 U1.28 U1.29 | length 21076.6
  Top Layer w10: v1(3240,3110) C16.1@3298.5,3110 ; R22.2@3279.49,3190.02 3240,3200 ; R22.2@3279.49,3209.98 3240,3200 ; R22.2@3280,3200 3240,3200 ; C16.1@3294.37,3095.48 v1@3246.85,3110 ; C16.1@3294.37,3124.52 v1@3246.85,3110 ; R22.2@3294.37,3185.48 3246.85,3200 ; R22.2@3294.37,3214.52 3246.85,3200 ; C16.1@3296.54,3110 v1@3246.85,3110 ; R22.2@3296.54,3200 3246.85,3200 ; R22.2@3298.5,3200 3240,3200 ; C8.1@3449.18,3016.78 3463.5,2986.5 ; C8.1@3463.5,3020 3463.5,2986.5 ; C8.1@3477.83,3016.78 3463.5,2986.5 ; R5.1@3510.33,2916.24 3505,2965 ; R5.1@3519.8,2908.15 3555,2891.5 ; R5.1@3524.53,2920 3505,2965 ; R5.1@3528.46,2920 3555,2891.5 ; R5.1@3536.97,2927.8 3505,2965 ; R5.1@3540.91,2927.8 3555,2891.5 ; v2(3791.65,2970.04) 3811.5,2950.2 C14.1@3811.5,2895 3811.5,2726.5 3775,2690 3585,2690 3555,2720 3555,2891.5 ; C14.1@3796.97,2892.83 3811.5,2845.32 C14.1@3826.02,2892.83 ; C14.1@3796.97,2897.17 3811.5,2944.68 C14.1@3826.02,2897.17 ; R10.1@3895,3360 4040,3360 4136.5,3263.5 ; R10.1@3896.88,3345.12 3955,3360 ; R10.1@3896.88,3374.88 3955,3360 ; R10.1@3900.21,3335.55 3955,3360 ; R10.1@3900.21,3384.45 3955,3360 ; C22.1@4122.02,3222.48 4136.5,3263.5 ; C22.1@4129.23,3208.58 4177.39,3179.1 ; C22.1@4138.46,3220 4177.39,3179.1 ; C22.1@4150.33,3228.66 4177.39,3179.1 ; C22.1@4150.97,3222.48 4136.5,3263.5 ; C17.1@4216.97,3042.17 4231.5,3089.68 C17.1@4246.02,3042.17 ; C17.1@4224.23,3028.58 4272.39,2999.1 ; C17.1@4233.46,3040 4272.39,2999.1 ; C17.1@4245.33,3048.66 4272.39,2999.1 ; T2.1@4265.33,2771.36 4285,2720 ; T2.1@4265.33,2778.64 4285,2830 ; R9.1@4270.48,2685.63 4285,2733.15 ; T2.1@4275.04,2774.09 4285,2720 ; T2.1@4275.04,2775.91 4285,2830 ; R9.1@4285,2681.5 T2.1@4285,2775 ; R9.1@4285,2683.46 4285,2733.15 ; T2.1@4285.91,2765.04 4340,2775 ; T2.1@4285.91,2784.96 4340,2775 ; T2.1@4288.64,2755.33 4340,2775 ; T2.1@4288.64,2794.67 4340,2775 ; T2.1@4294.96,2774.09 4285,2720 ; T2.1@4294.96,2775.91 4285,2830 ; R9.1@4299.52,2685.63 4285,2733.15 ; T2.1@4304.67,2771.36 4285,2720 ; T2.1@4304.67,2778.64 4285,2830 ; C13.2@4508.36,2814.23 4450.13,2775 ; C13.2@4513.44,2805.36 4450.13,2775 ; C13.2@4514.9,2747.9 4450.13,2775 ; C13.2@4517.13,2795.97 4450.13,2775 ; C13.2@4518.15,2757.59 4450.13,2775 ; C13.2@4519.94,2767.52 4450.13,2775 ; 3463.5,2986.5 3485,2965 3505,2965 ; 3505,2965 3526.5,2943.5 ; R5.1@3526.5,2920 3526.5,2943.5 ; R5.1@3526.5,2920 3555,2891.5 ; R5.1@3526.5,2920 3526.5,2943.5 ; 3526.5,2943.5 3512.55,2924.59 3526.5,2943.5 ; 3526.5,2943.5 3540.45,2924.59 3526.5,2943.5 ; 4136.5,3263.5 C22.1@4136.5,3220 4231.5,3125 C17.1@4231.5,3040 4285,2986.5 T2.1@4285,2775 ; T2.1@4285,2775 4513.11,2775 C13.2@4520,2781.89 4450.13,2775
  Top Layer w50: P2.1@2114.41,2437.95 2496.06,2437.95 C2.2@2520,2461.89 ; 2319.51,2437.95 C2.2@2520,2461.89 ; C2.2@2520,2461.89 2953.11,2461.89 3335,2080 C12.2@4429.76,2080 ; C12.2@4429.76,2080 C11.1@4557.01,2207.24 ; C12.2@4429.76,2080 4557.01,2216.06 4429.76,2084.92 C11.1@4557.01,2207.24 ; C11.1@4557.01,2207.24 C11.1@4557.01,2220 ; C11.1@4557.01,2220 C9.1@4557.01,2350 4557.01,2223.94 4557.01,2346.06 C11.1@4557.01,2220
  VCC w10: v1(3570,3200) 3570,3170 3605,3135 3605.36,3135 3640.39,3099.96 v2(3748.35,3099.96)
  Bottom Layer w10: v1(3240,3110) 3240,2895 3280,2855 C5.2@3382.01,2855 3382.01,2532.01 3365,2515 ; R17.2@3526.5,3200 v1(3570,3200) ; R17.2@3528.46,3200 v1(3570,3200) ; R17.2@3531.06,3185.55 v1(3570,3200) ; R17.2@3531.06,3214.45 v1(3570,3200) ; R17.2@3531.88,3185.85 v1(3570,3200) ; R17.2@3531.88,3214.15 v1(3570,3200) ; U1.12@3656.81,3150.16 3689.84,3150.16 ; 3713.07,3126.93 v2(3748.35,3099.96) ; U1.29@3761.46,3077.21 3791.65,3159.69 ; U1.29@3770,3035 U1.29@3770,3069.99 ; 3772.08,3136.27 v2(3748.35,3099.96) ; 3772.71,3141.79 v2(3748.35,3099.96) ; 3774.63,3133.71 v2(3748.35,3099.96) ; 3778.92,3134.31 v2(3748.35,3099.96) ; v2(3791.65,3013.35) 3808.39,2996.61 U1.23@3883.19,2996.61 ; v2(3791.65,3056.65) 3838.48,3047.8 ; U1.29@3800.51,3047.8 U1.21@3883.19,3047.8 ; U1.29@3818.91,3076.19 3791.65,3159.69 ; U1.29@3822.68,2996.61 U1.23@3859.57,2996.61 ; U1.29@3822.68,3047.8 U1.21@3859.57,3047.8 ; R10.1@3870.55,3354.79 3895,3300 ; R10.1@3880.12,3358.12 3895,3300 ; U1.28@3883.19,2868.66 3976.85,2775 T2.1@4285,2775 ; R10.1@3896.88,3345.12 3955,3360 ; R10.1@3896.88,3374.88 3955,3360 ; R10.1@3900.21,3335.55 3955,3360 ; R10.1@3900.21,3384.45 3955,3360 ; R10.1@3909.88,3358.12 3895,3300 ; R10.1@3919.45,3354.79 3895,3300 ; C20.1@4056.98,3312.22 4071.5,3358.5 ; C20.1@4071.5,3310 4071.5,3358.5 ; C20.1@4086.01,3312.22 4071.5,3358.5 ; R19.2@4224.31,3036.48 4270,3063.5 ; R19.2@4231.5,3025 4270,3063.5 ; R19.2@4233.46,3025 4270,3063.5 ; R19.2@4245.41,3016.46 4270,3063.5 ; v1(3570,3200) 3530,3200 v1(3570,3200) ; 3689.84,3150.16 U1.29@3770,3069.99 ; 3689.84,3150.16 3680.43,3150.16 3689.84,3150.16 ; v2(3748.35,3099.96) U1.29@3770,3069.99 ; v2(3748.35,3099.96) 3727.81,3099.37 3791.65,3159.69 ; v2(3748.35,3099.96) 3735.33,3092.29 3791.65,3159.69 ; v2(3748.35,3099.96) 3743.51,3086.22 3791.65,3159.69 ; v2(3748.35,3099.96) 3752.26,3081.19 3791.65,3159.69 ; v2(3791.65,3099.96) 3791.65,3186.65 3895,3290 R10.1@3895,3360 ; v2(3791.65,3099.96) 3808.92,3073.57 3791.65,3159.69 ; v2(3791.65,3099.96) 3791.65,3159.69 ; v2(3791.65,3099.96) 3798.84,3072.15 3791.65,3159.69 ; v2(3791.65,3099.96) 3791.65,3159.69 ; v2(3791.65,3099.96) 3791.65,3159.69 ; v2(3791.65,3099.96) 3788.75,3071.9 3791.65,3159.69 ; v2(3791.65,3099.96) 3791.65,3159.69 ; v2(3791.65,3099.96) 3778.76,3072.81 3791.65,3159.69 ; v2(3791.65,3099.96) 3791.65,3159.69 ; v2(3791.65,3099.96) 3770,3074.57 3791.65,3159.69 ; 3895,3300 R10.1@3895,3360 ; R10.1@3895,3360 4070,3360 ; 4070,3360 4071.5,3358.5 ; 4070,3360 4175,3360 4270,3265 4270,3063.5
  Bottom Layer w20: C3.1@2490.64,2423.54 R34.2@2505.43,2519.75 ; C3.1@2494.79,2426.38 2520,2518.43 C3.1@2545.21,2426.38 ; C3.1@2499.24,2429.05 R34.2@2534.57,2519.75 ; R34.2@2500.59,2541.53 2520,2454.13 R34.2@2539.41,2541.53 ; C3.1@2516.06,2422.99 R34.2@2505.43,2519.75 ; C3.1@2520,2422.99 R34.2@2520,2543.66 ; C3.1@2523.94,2422.99 R34.2@2534.57,2519.75 ; C3.1@2540.76,2429.05 R34.2@2505.43,2519.75 ; C3.1@2549.36,2423.54 R34.2@2534.57,2519.75 ; T2.1@4285,2775 4295,2785 Q3.1@4565,2785 Q3.2@4565,2835 Q3.3@4565,2885
  Bottom Layer w30: Q2.2@3290,2390 Q2.3@3340,2390
  Bottom Layer w50: C3.1@2550.63,2422.99 C4.1@2736.06,2422.99 ; C4.1@2743.94,2422.99 2954.05,2390 ; Q2.2@3290,2390 3290,2440 3361.42,2511.42 ; T2.1@4285,2770 4030,2515 3365,2515 Q2.1@3240,2390 2772.99,2390 C4.1@2740,2422.99 C3.1@2520,2422.99 ; T2.1@4285,2775 4502.01,2557.99 C10.1@4502.01,2498.94 ; D4.1@2250,2438.74 P2.1@2114.41,2437.95 2249.21,2437.95 D4.1@2264.17,2422.99 ; D4.1@2250,2438.74 C1.1@2390,2422.99 ; D4.1@2250,2438.74 2386.06,2422.99 D4.1@2264.17,2422.99 ; D4.1@2264.17,2422.99 C1.1@2390,2422.99 ; C1.1@2390,2422.99 C3.1@2520,2422.99 ; C1.1@2390,2422.99 2516.06,2422.99 2393.94,2422.99 C3.1@2520,2422.99 ; C3.1@2523.94,2422.99 2709.37,2422.99 C3.1@2523.94,2422.99
  other v1: 2850,2425 3000,2425 3050,2425 3100,2425 3150,2425 3200,2425 3050,2475 3100,2475 3150,2475 3200,2475 3250,2475 3300,2475 2875,2500 2925,2500 2100,2525 2150,2525 2200,2525 2250,2525 2300,2525 2350,2525 2400,2525 2450,2525 3100,2525 3150,2525 3200,2525 3250,2525 3300,2525 3350,2525 4100,2525 4150,2525 4200,2525 2925,2550 2975,2550 4375,2550 3250,2575 3300,2575 3350,2575 3900,2575 3950,2575 4000,2575 4050,2575 4150,2575 4200,2575 4375,2600 3400,2625 3450,2625 3500,2625 3775,2625 3950,2625 4000,2625 4050,2625 4100,2625 4200,2625 3650,2650 4375,2650 3250,2675 3400,2675 3450,2675 3500,2675 3825,2675 4000,2675 4050,2675 4100,2675 4150,2675 4200,2675 4375,2700 3300,2725 3400,2725 3450,2725 3500,2725 4050,2725 4100,2725 4150,2725 4200,2725 4375,2750 4100,2775 4150,2775 4200,2775 4100,2825 4150,2825 4200,2825 4250,2825 4325,2825 4375,2825 4175,2875 4225,2875 4275,2875 4325,2875 4375,2875 4225,2925 4275,2925 4325,2925 4375,2925 4325,3000 4375,3000 4325,3050 4375,3050 4525,3050 4575,3050 4700,3050 4750,3050 4800,3050 4850,3050 4900,3050 4325,3100 4375,3100 4650,3100 4700,3100 4750,3100 4800,3100 4850,3100 4900,3100 4600,3150 4650,3150 4700,3150 4750,3150 4800,3150 4850,3150 4900,3150 4550,3200 4600,3200 4650,3200 4700,3200 4750,3200 4800,3200 4850,3200 4900,3200 3250,3250 4325,3250 4375,3250 4500,3250 4550,3250 4600,3250 4650,3250 4700,3250 4750,3250 4800,3250 4850,3250 4900,3250 3250,3300 4450,3300 4500,3300 4550,3300 4600,3300 4650,3300 4700,3300 4750,3300 4800,3300 4850,3300 4250,3350 4300,3350 4350,3350 4400,3350 4450,3350 4500,3350 4550,3350 4600,3350 4650,3350 4700,3350 4750,3350 4800,3350 3250,3400 3600,3400 4200,3400 4250,3400 4300,3400 4350,3400 4400,3400 4450,3400 4500,3400 4550,3400 4600,3400 4650,3400 4700,3400 4750,3400
  other v2: 3748.35,2970.04 3748.35,3013.35 3748.35,3056.65
IN_N: C4.2 C5.1 Q1.5 R1.2 R4.2 U1.3 | length 9643
  VCC w10: v1(2655,2125) 2655,2390 3260,2995 v1(3325,2995) 3285,2995
  VCC w15: v3(2805,2295) 3300,2790 v3(3510,2790) 3452.5,2790
  Bottom Layer w10: v1(2655,2125) R1.2@2769.92,2125 ; R1.2@2753.52,2073.49 2680.87,2125 ; R1.2@2753.52,2176.51 2680.87,2125 ; R1.2@2759.02,2082.31 2680.87,2125 ; R1.2@2759.02,2167.69 2680.87,2125 ; R1.2@2763.41,2091.57 2680.87,2125 ; R1.2@2763.41,2158.43 2680.87,2125 ; R1.2@2766.67,2101.17 2680.87,2125 ; R1.2@2766.67,2148.83 2680.87,2125 ; R1.2@2768.81,2110.99 2680.87,2125 ; R1.2@2768.81,2139.01 2680.87,2125 ; R4.2@3353.28,2959.26 v1(3325,2995) ; R4.2@3354.19,2957.05 3338.5,2995 ; R4.2@3362.34,2969.49 v1(3325,2995) ; R4.2@3362.89,2970.62 v1(3325,2995) ; R4.2@3365.52,2981.62 v1(3325,2995) ; R4.2@3366.54,2965 3338.5,2995 ; R4.2@3368.5,2965 3338.5,2995 ; R4.2@3375.3,2976.78 3338.5,2995 ; v1(3325,2995) 3338.5,2995 ; v1(3325,2995) 3338.5,2995 ; v1(3325,2995) 3338.5,2995 ; v1(3325,2995) 3338.5,2995 ; v1(3325,2995) 3338.5,2995
  Bottom Layer w15: C4.2@2740,2297.01 v3@2802.99,2297.01 ; C4.2@2743.94,2297.01 v3@2802.99,2297.01 ; C4.2@2745.35,2284.15 v3@2802.99,2297.01 ; C4.2@2745.35,2309.86 v3@2802.99,2297.01 ; C4.2@2748.01,2284.75 v3(2805,2295) ; C4.2@2748.77,2309.1 v3(2805,2295) ; C4.2@2750.54,2269.87 v3@2802.99,2297.01 ; C4.2@2750.54,2324.15 v3@2802.99,2297.01 ; C4.2@2751.43,2270.32 v3(2805,2295) ; C4.2@2752.82,2322.97 v3(2805,2295) ; C5.1@3481.02,2843.79 v3(3510,2790) ; C5.1@3495.18,2849.27 v3(3510,2790) ; C5.1@3500.34,2885.8 3592.56,2897.56 ; C5.1@3503.45,2871.05 3592.56,2897.56 ; C5.1@3507.99,2851.06 v3(3510,2790) ; C5.1@3507.99,2858.94 3592.56,2897.56 ; C5.1@3514.17,2847.57 3592.56,2897.56 ; C5.1@3520.89,2850.12 v3(3510,2790) ; C5.1@3523.28,2835.56 3592.56,2897.56 ; C5.1@3535.38,2845.57 v3(3510,2790) ; U1.3@3633.19,2919.84 3614.84,2919.84 ; U1.3@3656.81,2919.84 3614.84,2919.84 ; v3(2805,2295) 2747.38,2297.01 v3(2805,2295) ; C5.1@3507.99,2855 3510,2852.99 v3(3510,2790) ; C5.1@3507.99,2855 3550,2855 ; C5.1@3507.99,2855 3550,2855 ; 3550,2855 3614.84,2919.84 ; 3550,2855 3517.28,2881.34 3550,2855 ; 3550,2855 3517.28,2828.66 3550,2855 ; 3550,2855 3509.98,2867.78 3550,2855 ; 3550,2855 3509.98,2842.22 3550,2855
  Bottom Layer w50: R1.2@2735.97,2134.09 C4.2@2740,2297.01 ; R1.2@2755.31,2167.57 Q1.5@2955.28,2243.74 ; R1.2@2765.22,2170.54 Q1.5@2973.35,2182.36 ; R1.2@2772.01,2091.01 2978.95,2120.81 R1.2@2773.38,2158.88 ; R1.2@2773.5,2091.13 Q1.5@2931.97,2125 ; R1.2@2773.5,2158.87 Q1.5@2931.97,2125 ; R1.2@2780.05,2104.3 Q1.5@2973.35,2182.36 ; R1.2@2789.23,2108.76 Q1.5@2955.28,2243.74 ; Q1.5@2956.09,2244.25 R1.2@2769.92,2125 ; Q1.5@2982.72,2185 R1.2@2769.92,2125 ; Q1.5@2990.97,2120.57 R1.2@2769.92,2125 ; Q1.5@2991.97,2185 Q1.5@2931.97,2125 ; C4.2@2740,2297.01 2740,2154.92 R1.2@2769.92,2125 ; C4.2@2740,2297.01 2802.56,2146.53 2743.94,2297.01 R1.2@2769.92,2136.81 ; C4.2@2740,2297.01 R1.2@2769.92,2136.81 ; R1.2@2769.92,2125 Q1.5@2931.97,2125 ; R1.2@2769.92,2136.81 Q1.5@2955.28,2243.74 ; R1.2@2769.92,2136.81 Q1.5@2973.35,2182.36
IN_P: C1.2 C2.1 C3.2 C31.2 C32.2 D4.2 P2.2 R1.1 R2.2 R3.2 R35.2 T3.1 U4.3 | length 11823.7
  Top Layer w10: R2.2@3293.12,2905.72 v1(3265,2920) ; R2.2@3293.12,2934.28 v1(3265,2920) ; R2.2@3296.54,2920 v1(3265,2920) ; R2.2@3298.5,2920 v1(3265,2920)
  Top Layer w50: P2.2@2114.41,2282.05 2436.06,2282.05 ; C2.1@2520,2198.11 2436.06,2282.05 ; C2.1@2520,2227.64 2436.06,2282.05
  VCC w10: v1(2582.99,2297.01) 2582.99,2482.99 v1(2750,2650) 2718.79,2618.79 ; v1(2620,2075) 2665,2075 2710,2120 2710,2400 3230,2920 ; v1(2620,2125) 2620,2400 3245,3025 v1(3325,3025) 3285,3025 ; 3230,2920 v1(3265,2920) 3230,2920
  Bottom Layer w10: R1.1@2503.47,2069.63 v1@2614.93,2075 ; R1.1@2503.44,2079.79 v1@2614.93,2075 ; R1.1@2504.33,2089.83 v1@2614.93,2075 ; R1.1@2504.43,2059.43 v1@2614.93,2075 ; R1.1@2506.11,2099.71 v1@2614.93,2075 ; R1.1@2510.08,2113.19 v1@2614.93,2075 ; R1.1@2511.19,2110.99 2599.13,2125 ; R1.1@2511.19,2139.01 2599.13,2125 ; R1.1@2513.33,2101.17 2599.13,2125 ; R1.1@2513.33,2148.83 2599.13,2125 ; R1.1@2515.71,2126.07 v1@2614.93,2075 ; R1.1@2516.59,2091.57 2599.13,2125 ; R1.1@2516.59,2158.43 2599.13,2125 ; C3.2@2520,2297.01 v1(2582.99,2297.01) ; R1.1@2520.7,2134.77 v1@2614.93,2075 ; R1.1@2520.98,2082.31 2599.13,2125 ; R1.1@2520.98,2167.69 2599.13,2125 ; C3.2@2523.94,2297.01 v1(2582.99,2297.01) ; C3.2@2524.86,2286.62 v1(2582.99,2297.01) ; C3.2@2524.86,2307.4 v1(2582.99,2297.01) ; R1.1@2526.48,2073.49 2599.13,2125 ; R1.1@2526.48,2143.03 v1@2614.93,2075 ; R1.1@2526.48,2176.51 2599.13,2125 ; C3.2@2527.47,2276.88 v1(2582.99,2297.01) ; C3.2@2527.47,2317.13 v1(2582.99,2297.01) ; C3.2@2531.78,2267.6 v1(2582.99,2297.01) ; C3.2@2531.78,2326.41 v1(2582.99,2297.01) ; R1.1@2533.03,2150.79 v1@2614.93,2075 ; R1.1@2540.33,2157.99 v1@2614.93,2075 ; 2580.02,2073.32 v1(2620,2075) ; 2580.02,2076.5 v1(2620,2075) ; 2580.16,2070.1 v1(2620,2075) ; 2580.15,2079.66 v1(2620,2075) ; 2580.42,2082.83 v1(2620,2075) ; 2581.07,2087.33 v1(2620,2075) ; 2582.08,2091.91 v1(2620,2075) ; 2583.02,2095.24 v1(2620,2075) ; 2584.18,2098.65 v1(2620,2075) ; v1@2585,2295 v1(2582.99,2297.01) ; 2585.56,2102.18 v1(2620,2075) ; 2587.53,2105.47 v1(2620,2075) ; v1(2620,2125) R1.1@2510.08,2125 2560.08,2075 v1(2620,2075) ; R35.2@2735.55,2688.94 v1(2750,2650) ; R35.2@2750,2691.54 v1(2750,2650) ; R35.2@2750,2693.5 v1(2750,2650) ; R35.2@2764.45,2688.94 v1(2750,2650) ; R3.2@3353.28,3060.74 v1(3325,3025) ; R3.2@3354.19,3062.95 3338.5,3025 ; R3.2@3362.34,3050.51 v1(3325,3025) ; R3.2@3362.89,3049.38 v1(3325,3025) ; R3.2@3365.52,3038.38 v1(3325,3025) ; R3.2@3366.54,3055 3338.5,3025 ; R3.2@3368.5,3055 3338.5,3025 ; R3.2@3375.3,3043.22 3338.5,3025 ; v1(3325,3025) 3338.5,3025 ; v1(3325,3025) 3338.5,3025 ; v1(3325,3025) 3338.5,3025 ; v1(3325,3025) 3338.5,3025 ; v1(3325,3025) 3338.5,3025
  Bottom Layer w20: P2.2@2088.24,2258.39 2021.54,2358.46 ; P2.2@2103.97,2270.89 2021.54,2358.46 ; P2.2@2123.35,2294.44 2021.54,2358.46 ; P2.2@2132.59,2312.28 2021.54,2358.46 ; C32.2@2341.54,2625 2288.5,2570 ; U4.3@2343.5,2796.69 C31.2@2343.5,2720 ; U4.3@2345.94,2783.39 C31.2@2343.5,2720 ; 2021.54,2358.46 P2.2@2114.41,2282.05 2097.95,2282.05 2005,2375 2005,2510 2065,2570 2288.5,2570 ; 2288.5,2570 C32.2@2343.5,2625 C31.2@2343.5,2720
  Bottom Layer w50: D4.2@2249.21,2282.05 P2.2@2114.41,2282.05 D4.2@2250,2281.26 ; D4.2@2250,2261.57 T3.1@2270,2115 2270,2261.26 D4.2@2250,2281.26 ; R1.1@2510.08,2125 2520,2134.92 C3.2@2520,2297.01 ; C3.2@2523.94,2297.01 2544.1,2138.32 C3.2@2520,2297.01 ; D4.2@2250,2281.26 C1.2@2390,2297.01 ; D4.2@2250,2281.26 2386.06,2297.01 2264.17,2297.01 C1.2@2390,2297.01 ; C1.2@2390,2297.01 C3.2@2520,2297.01 ; C1.2@2390,2297.01 C3.2@2516.06,2297.01 ; C3.2@2516.06,2297.01 2510.08,2136.81 C3.2@2520,2297.01 ; C3.2@2516.06,2297.01 2476.5,2142.51 C3.2@2520,2297.01 ; C3.2@2516.06,2297.01 2393.94,2297.01 C3.2@2520,2297.01
  other v1: 2450,2025 2550,2025 2410,2075 2410,2125 2410,2175 2410,2225
INVTCC: C14.2 C21.2 D1.1 R18.1 U1.2 | length 1878.6
  Top Layer w10: C21.2@3511.97,3292.17 3526.5,3339.68 ; R18.1@3511.97,3377.83 3526.5,3330.32 R18.1@3541.02,3377.83 ; C21.2@3526.5,3300 R18.1@3526.5,3380 ; C21.2@3528.46,3290 3560,3290 ; C21.2@3531.88,3275.72 3560,3290 ; C21.2@3531.88,3304.28 3560,3290 ; C21.2@3541.02,3292.17 3526.5,3339.68 ; C14.2@3733.19,2888.86 3715.85,2944.15 ; C14.2@3743.94,2880.55 v1(3705,2895) ; C14.2@3743.94,2909.45 v1(3705,2895) ; C14.2@3757.91,2904.29 3715.85,2944.15 ; 3526.5,3339.68 C21.2@3526.5,3290 3560,3290 ; 3560,3290 3680,3170 3680,2980 3748.5,2911.5 C14.2@3748.5,2895 v1(3705,2895) ; v1(3705,2895) 3746.54,2895 3715.85,2944.15
  Bottom Layer w10: U1.2@3656.81,2894.25 v1@3704.25,2894.25 ; U1.2@3664.98,2894.25 v1(3705,2895) ; D1.1@3669.45,2775 3715,2775 ; D1.1@3674.45,2775 3715,2775 ; D1.1@3674.97,2768.52 3715,2775 ; D1.1@3674.97,2781.48 3715,2775 ; D1.1@3677.8,2758.85 3715,2775 ; D1.1@3677.8,2791.15 3715,2775 ; D1.1@3683.11,2749.96 3715,2775 ; D1.1@3683.11,2800.04 3715,2775 ; v1@3704.25,2894.25 v1(3705,2895) ; v1@3704.25,2894.25 3680.43,2894.25 v1(3705,2895) ; v1(3705,2895) 3735,2865 3735,2795 3715,2775
ISMON: C17.2 R14.2 U2.12 | length 2406.9
  Top Layer w10: U2.12@2809.25,2946.61 2809.25,2884.25 2795,2870 2795,2720 2915,2600 3835,2600 4168.5,2933.5 C17.2@4168.5,3040 R14.2@4071.5,3040 R14.2@4080,3031.5 ; R14.2@4073.46,3040 4123.15,3040 ; R14.2@4075.63,3025.48 4123.15,3040 ; R14.2@4075.63,3054.52 4123.15,3040 ; C17.2@4153.98,3037.83 4168.5,2990.32 C17.2@4183.03,3037.83 ; C17.2@4164.37,3025.48 4116.85,3040 ; C17.2@4164.37,3054.52 4116.85,3040 ; C17.2@4166.54,3040 4116.85,3040
IVINMON: C16.2 R13.2 U2.14 | length 1779.3
  Top Layer w10: U2.14@2872.24,2946.61 2872.24,2707.76 2930,2650 3155,2650 3230,2725 3230,2995 3300,3065 3340,3065 ; C16.2@3345.33,3113.76 3340,3065 ; C16.2@3359.53,3110 3340,3065 ; C16.2@3363.46,3110 3413.15,3110 ; C16.2@3365.63,3095.48 3413.15,3110 ; C16.2@3365.63,3124.52 3413.15,3110 ; C16.2@3371.97,3102.2 3340,3065 ; R13.2@3459.37,3095.48 3411.85,3110 ; R13.2@3459.37,3124.52 3411.85,3110 ; R13.2@3461.54,3110 3411.85,3110 ; R13.2@3463.5,3110 C16.2@3361.5,3110 ; 3340,3065 3361.5,3086.5 ; 3361.5,3086.5 C16.2@3361.5,3110 ; 3361.5,3086.5 3375.45,3105.41 3361.5,3086.5 ; 3361.5,3086.5 3347.55,3105.41 3361.5,3086.5 ; 3361.5,3086.5 C16.2@3361.5,3110
LD-: C18.1 C19.1 D2.1 P4.3 P4.4 Q3.5 | length 2633.4
  Top Layer w50: P4.3@4956.69,2632.05 D2.1@4770,2648.74 4786.69,2632.05 P4.3@4997.28,2632.05
  Bottom Layer w50: Q3.5@4659.99,2841.57 C18.1@4760,2617.99 ; Q3.5@4682.9,2790.35 4756.06,2617.99 Q3.5@4731.38,2801.64 ; Q3.5@4713.03,2860 4760,2813.03 C18.1@4760,2617.99 ; Q3.5@4722.28,2860 C18.1@4760,2617.99 ; Q3.5@4780.64,2802.5 4763.94,2617.99 C19.1@4885,2596.34 ; Q3.5@4787.23,2861.4 C18.1@4760,2617.99 ; P4.4@4997.28,2787.95 P4.3@4997.28,2632.05 ; C18.1@4760,2617.99 4781.65,2596.34 C19.1@4885,2596.34 ; C19.1@4885,2596.34 4961.57,2596.34 P4.3@4997.28,2632.05 ; C19.1@4885,2596.34 P4.3@4997.28,2632.05
LP+: C30.2 P1.3 R33.2 U2.6 | length 1750.9
  Top Layer w10: v1(2530,2985) 2550,2985 2627.76,3062.76 ; U2.6@2637.46,3057.13 2627.76,3062.76 ; U2.6@2637.46,3068.38 2627.76,3062.76 ; U2.6@2638.98,3062.76 2627.76,3062.76 ; U2.6@2661.61,3062.76 2757.76,3062.76 v1(2855,3160)
  Bottom Layer w10: R33.2@2568.94,2970.55 v1(2530,2985) ; R33.2@2568.94,2999.45 v1(2530,2985) ; R33.2@2571.54,2985 v1(2530,2985) ; R33.2@2573.5,2985 v1(2530,2985) ; P1.3@2770,3410 2780,3410 2855,3335 v1(2855,3160)
  Bottom Layer w15: C30.2@2559.35,2895.08 2565.85,2960.39 ; C30.2@2561.37,2896.15 2573.5,2959.68 C30.2@2585.63,2896.15 ; R33.2@2561.37,2983.85 2573.5,2920.32 ; C30.2@2563.48,2897.18 2581.16,2960.39 ; C30.2@2571.54,2895 2565.85,2960.39 ; R33.2@2573.5,2985 C30.2@2573.5,2895 ; C30.2@2575.47,2895 2581.16,2960.39 ; C30.2@2583.52,2897.18 2565.85,2960.39 ; R33.2@2585.63,2983.85 2573.5,2920.32 ; C30.2@2587.66,2895.08 2581.16,2960.39 ; C30.2@2573.5,2895 2573.5,2920.32 ; C30.2@2573.5,2895 2573.5,2920.32 ; 2573.5,2920.32 2561.68,2897.93 2573.5,2920.32 ; 2573.5,2920.32 2585.33,2897.93 2573.5,2920.32